# Altium PCB VE_Test_MEA_Solid_100mil.PcbDoc
Units mil, origin at the board's own origin, x right, y up, seen from the top; angles counter-clockwise.
Board outline 1950.82 x 1950 mil, 4 copper layers (Top Copper Layer, Internal Copper Layer 1, Internal Copper Layer 2, Bottom Copper Layer), stack 62.205 mil thick; 1 components, 1 nets, 60 pads, 104 vias.
Unrouted connection lines stored in the file: 17.
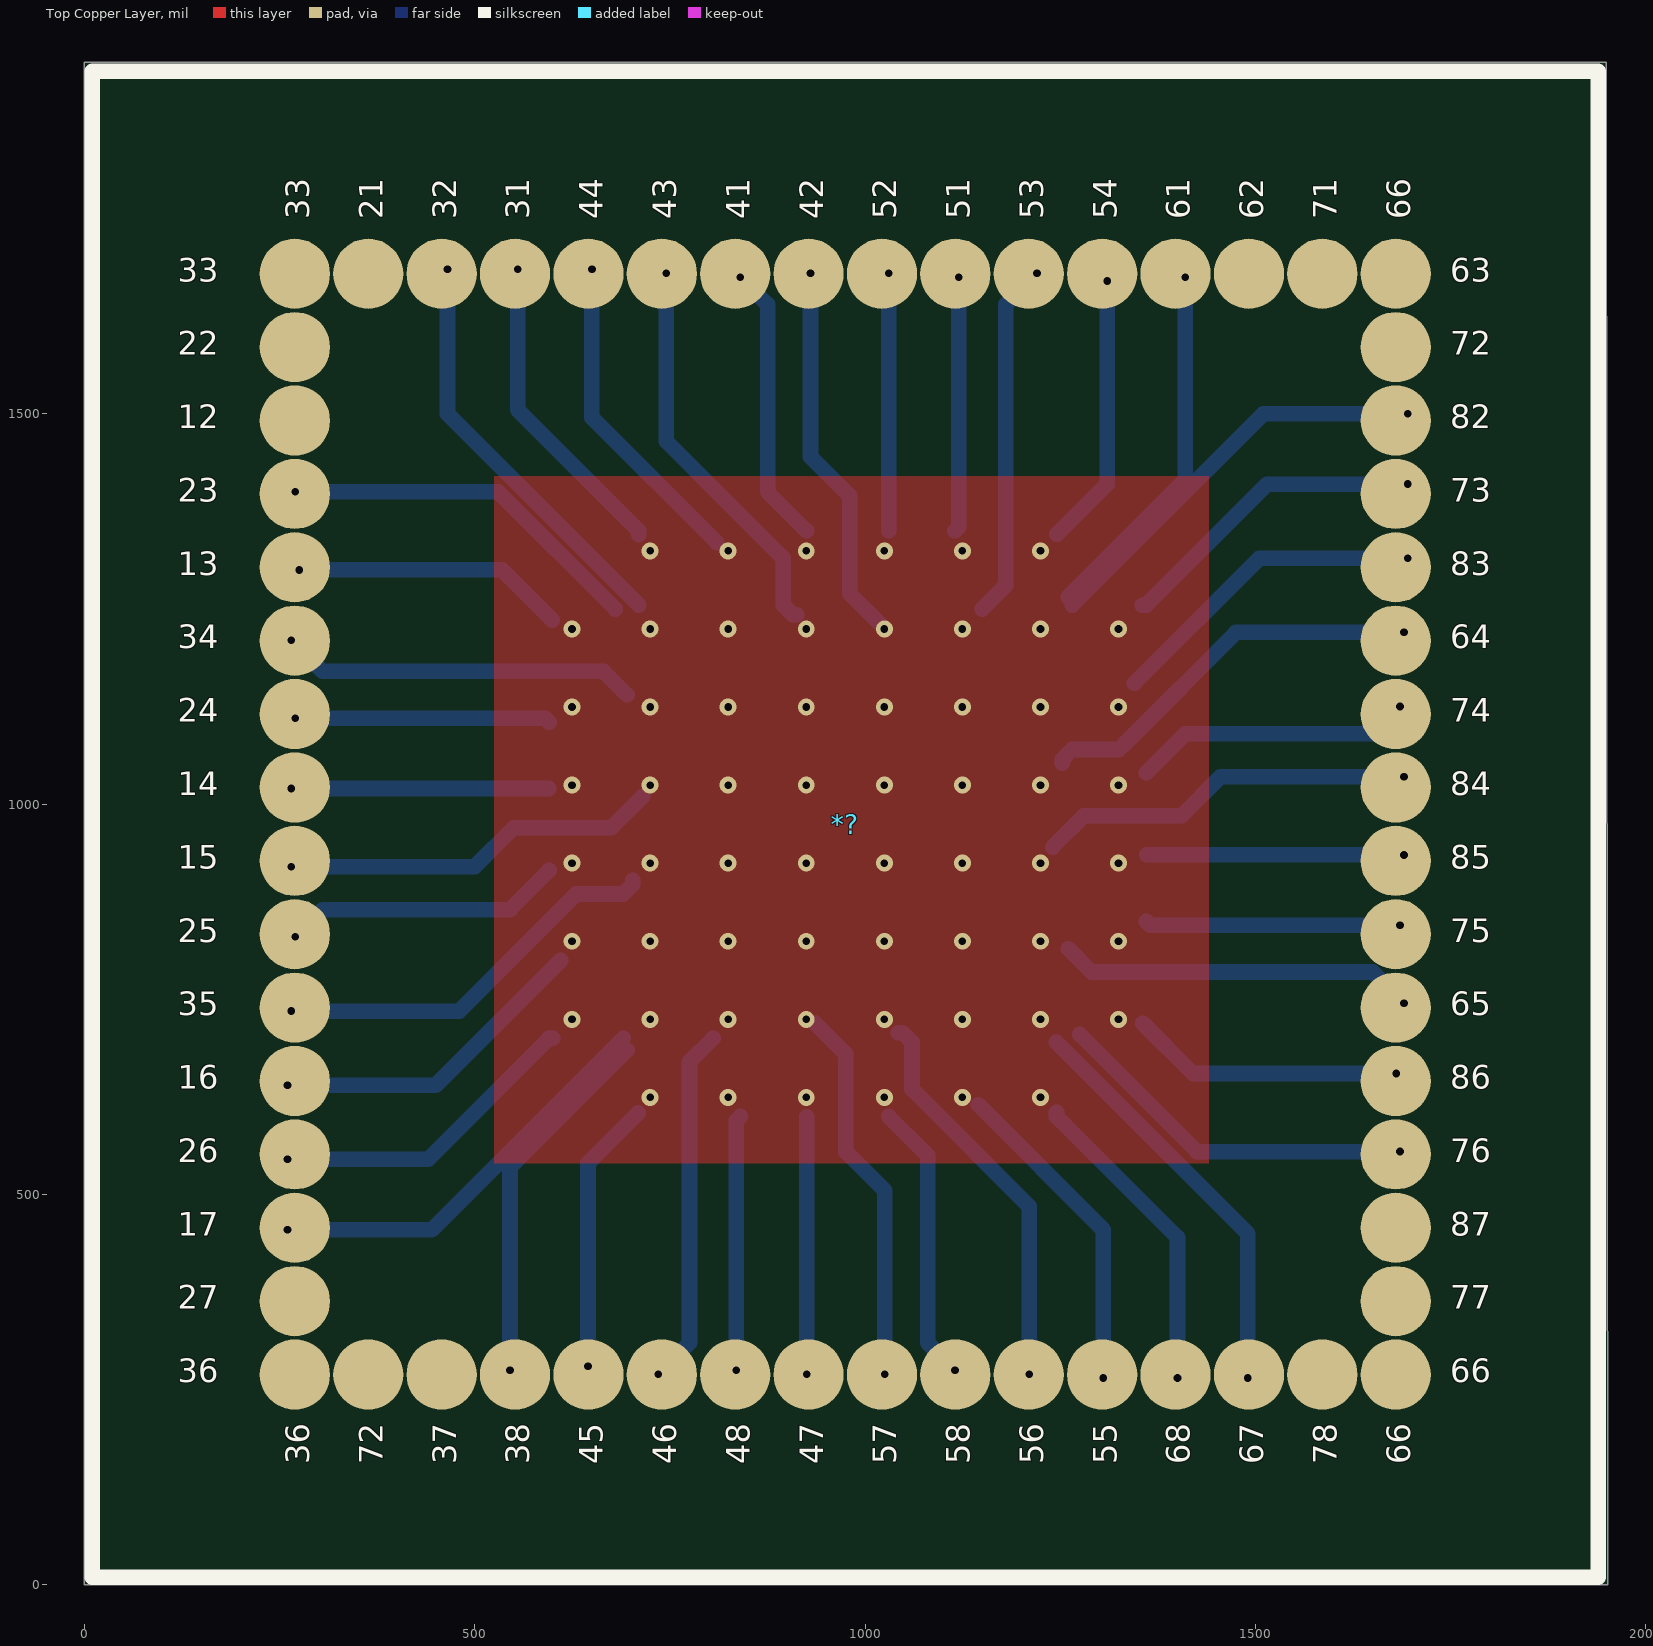
[diagram p0: Top Copper Layer view]
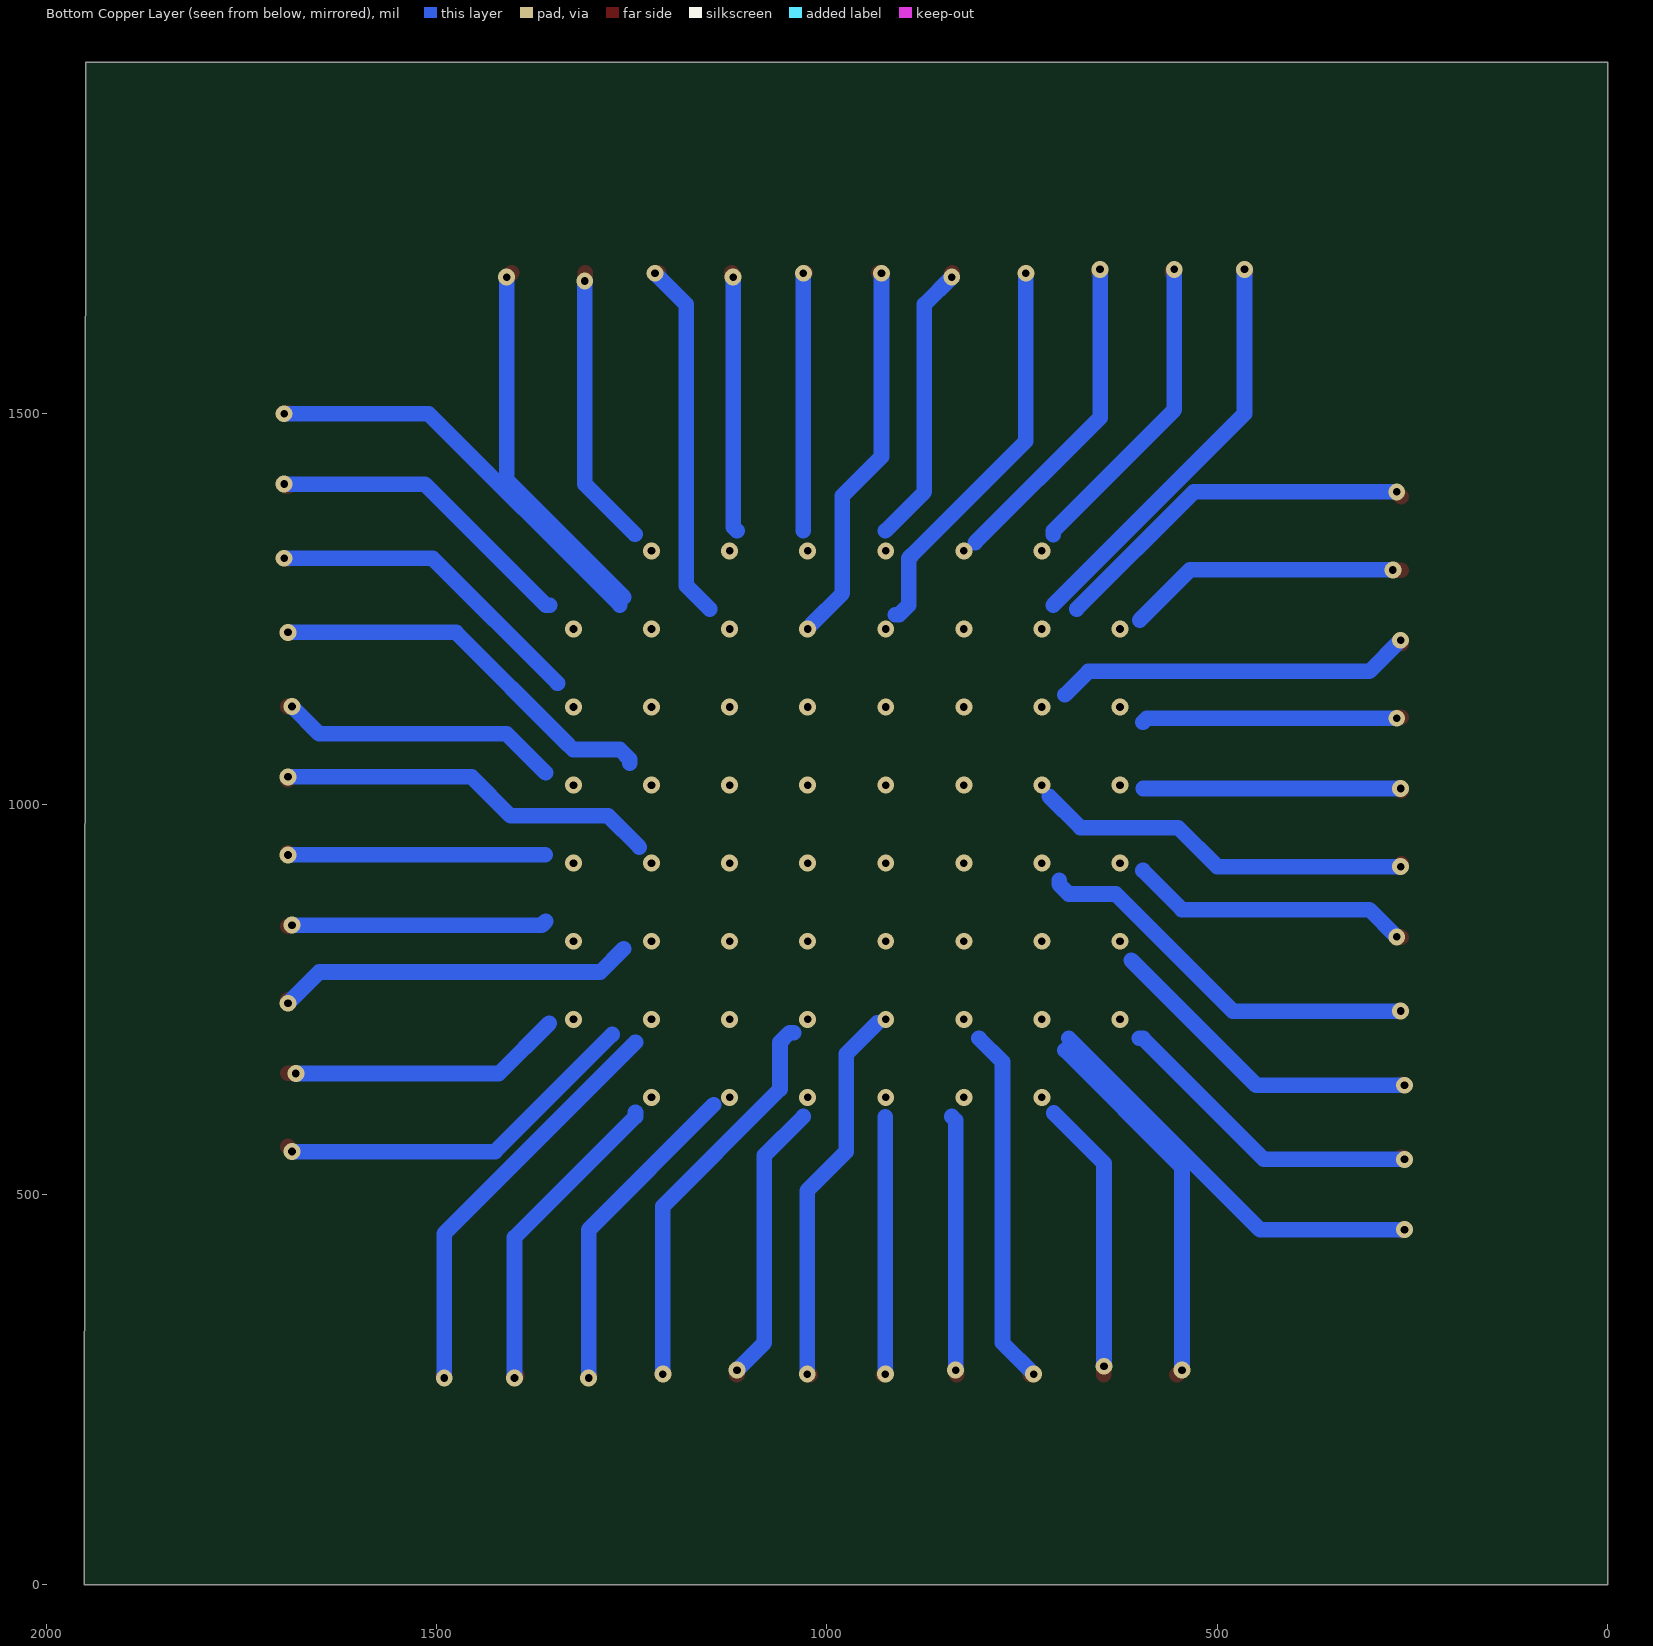
[diagram p1: Bottom Copper Layer view, seen from below]

## Layer stack, top to bottom
Top Solder: solder mask 0.3937, Solder Resist, Dk 3.5
Top Copper Layer: signal copper 1.378
Dielectric 1: prepreg 8.6614, FR-4, Dk 4.2
Internal Copper Layer 1: signal copper 1.378
Dielectric 2: core 39.3701, FR-4, Dk 4.2
Internal Copper Layer 2: signal copper 1.378
Dielectric 3: prepreg 8.6614, FR-4, Dk 4.2
Bottom Copper Layer: signal copper 1.378
Bottom Solder: solder mask 0.3937, Solder Resist, Dk 3.5

## Board outline
0,0 1950.82,0 1949.19,1950 0,1950

## Design rules (kind name [scope] priority, off if disabled: settings)
BoardOutlineClearance [All] p1: gap=15.75 ignorepadtopadclearanceinfootprint=FALSE
Clearance [All] p1: gap=4 ignorepadtopadclearanceinfootprint=TRUE
ComponentClearance [All] p1: gap=5.91 collisioncheckmode=3 verticalgap=5.91 showdistances=FALSE
HoleSize [All] p1: absolutevalues=TRUE maxlimit=15.75 minlimit=9.84 maxpercent=80.000 minpercent=20.000
HoleToHoleClearance [All] p1: gap=17.72 allowstackedmicrovias=TRUE
MinimumAnnularRing [All] p1: minimumring=5.91
MinimumSolderMaskSliver [All] p1: minsoldermaskwidth=5.91
PlaneClearance [All] p1: clearance=5.91
PlaneConnect [All] p1: planeconnectstyle=Relief reliefexpansion=9.84 reliefentries=4 reliefconductorwidth=5.91 reliefairgap=5.91
PolygonConnect [All] p1: connectstyle=Direct reliefconductorwidth=5.91 reliefentries=4 polygonreliefangle="90 Angle" airgapwidth=5.91
RoomDefinition VE_Test_MEA_Solid [InComponentClass('VE_Test_MEA_Solid')] p1 off: confinementstyle=ConfineIn formatcopy=TRUE lockcomponents=FALSE outline 0,0 2000,0 2000,1000 0,1000
RoutingVias [All] p1: holewidth=9.84 width=21.65 viastyle="Through Hole" minholewidth=9.84 minwidth=21.65 maxholewidth=15.75 maxwidth=31.5
SilkToSilkClearance [All] p1: silktosilkclearance=7.87
SilkToSolderMaskClearance [IsPad] p1: minsilkscreentomaskgap=7.87 clearancetoexposedcopper=TRUE
SolderMaskExpansion [All] p1: expansion=5.91 istentingtop=FALSE
Width [All] p1: maxlimit=1968.5 minlimit=5.91 preferedwidth=5.91
22 further rules are at their usual default settings.

## Components (designator, comment, footprint, x,y, rotation, side; value= is the part's Value field where it differs from the comment)
*? "POGO_PINS" MCS_MEA 974.5,974.41 r0 top locked

## Footprints (in the part's own frame and the unit in brackets; to place one, negate y for a bottom-side part, rotate by r counter-clockwise, add the part's x,y. Pads: shape width x height; smd on the part's side, far side on the other; paste and mask are expansions set on the pad)
MCS_MEA [mil]
  round 90 smd: 1(-705,-705) 1(-705,705) 2(-705,-611) 2(-611,-705) 2(-611,705) 2(705,-611) 3(-705,-517) 3(-517,-705) 3(-517,705) 3(705,-517) 4(-705,-423) 4(-423,-705) 4(-423,705) 4(705,-423) 5(-705,-329) 5(-329,-705) 5(-329,705) 5(705,-329) 6(-705,-235) 6(-235,-705) 6(-235,705) 6(705,-235) 7(-705,-141) 7(-141,-705) 7(-141,705) 7(705,-141) 8(-705,-47) 8(-47,-705) 8(-47,705) 8(705,-47) 9(-705,47) 9(47,-705) 9(47,705) 9(705,47) 10(-705,141) 10(141,-705) 10(141,705) 10(705,141) 11(-705,235) 11(235,-705) 11(235,705) 11(705,235) 12(-705,329) 12(329,-705) 12(329,705) 12(705,329) 13(-705,423) 13(423,-705) 13(423,705) 13(705,423) 14(-705,517) 14(517,-705) 14(517,705) 14(705,517) 15(-705,611) 15(611,-705) 15(611,705) 15(705,611) 16(705,-705) 16(705,705)
  silkscreen extent -965,-965 965,965

## Via types
v1: diameter 21.65, hole 9.84, Top Copper Layer to Bottom Copper Layer, 104 vias

## Nets (pads, with @x,y where several pads share a name; then routed paths per layer and width w, separated by ;. In a path a pad name is that pad's centre, name@x,y a point inside that pad or via, vN(x,y) a via of type N, cw(c..) or ccw(c..) an arc to the next point about the centre after c; other vN are vias at no path point)
Net*?_12: *?.12 *?.13 *?.14 *?.15 *?.16 | length 6076.2
  Top Copper Layer w20: v1@264.41,923.5 264.41,920.59 v1(265,920) ; *?.12@264.41,1299.5 274.5,1299.5 v1(275,1300) ; *?.13@264.41,1393.5 270,1399.09 v1(270,1400) ; v1(650,1685) 650,1682.09 v1@651.5,1680.59 ; v1(930,1680) 930.59,1680.59 v1@933.5,1680.59 ; *?.12@1303.5,269.41 1305,267.91 v1(1305,265) ; *?.12@1309.5,1680.59 1309.5,1670.5 v1(1310,1670) ; *?.13@1397.5,269.41 1397.5,267.5 v1(1400,265) ; *?.13@1403.5,1680.59 1409.09,1675 v1(1410,1675) ; v1(1490,265) 1490,267.91 *?.14@1491.5,269.41 ; *?.12@1690.59,1313.5 1692.09,1315 v1(1695,1315) ; *?.13@1690.59,1407.5 1692.5,1407.5 v1(1695,1410) ; *?.14@1690.59,1501.5 1692.09,1500 v1(1695,1500)
  Bottom Copper Layer w20: v1(265,920) 500,920 550,970 675,970 715,1010 ; v1(270,1400) 530,1400 680,1250 ; v1(275,1300) 535,1300 599.4,1235.6 ; v1(650,1685) 650,1495 810,1335 ; v1(930,1680) 930,1445 980,1395 980,1270 v1@1020,1230 ; 935,720 975,680 975,555 1025,505 ; 1145,615 1305,455 v1(1305,265) ; 1245,605 1245,600 1400,445 v1(1400,265) ; 1245,695 1490,450 v1(1490,265) ; 1245.6,1345.6 1310,1410 v1(1310,1670) ; 1260,1265 1410,1415 v1(1410,1675) ; 1265,1255 1510,1500 v1(1695,1500) ; 1345,1155 1505,1315 v1(1695,1315) ; 1355,1255 1360,1255 1515,1410 v1(1695,1410)
  other v1: 724.5,624.41 824.5,624.41 924.5,624.41 1024.5,624.41 1124.5,624.41 1224.5,624.41 624.5,724.41 724.5,724.41 824.5,724.41 924.5,724.41 1024.5,724.41 1124.5,724.41 1224.5,724.41 1324.5,724.41 624.5,824.41 724.5,824.41 824.5,824.41 924.5,824.41 1024.5,824.41 1124.5,824.41 1224.5,824.41 1324.5,824.41 624.5,924.41 724.5,924.41 824.5,924.41 924.5,924.41 1024.5,924.41 1124.5,924.41 1224.5,924.41 1324.5,924.41 624.5,1024.41 724.5,1024.41 824.5,1024.41 924.5,1024.41 1024.5,1024.41 1124.5,1024.41 1224.5,1024.41 1324.5,1024.41 624.5,1124.41 724.5,1124.41 824.5,1124.41 924.5,1124.41 1024.5,1124.41 1124.5,1124.41 1224.5,1124.41 1324.5,1124.41 624.5,1224.41 724.5,1224.41 824.5,1224.41 924.5,1224.41 1024.5,1224.41 1124.5,1224.41 1224.5,1224.41 1324.5,1224.41 724.5,1324.41 824.5,1324.41 924.5,1324.41 1024.5,1324.41 1124.5,1324.41 1224.5,1324.41
pads on no net: *?.1 *?.2 *?.3 *?.4 *?.5 *?.6 *?.7 *?.8 *?.9 *?.10 *?.11
copper on no net: | length 12752.3
  Top Copper Layer w20: v1(260,455) 262.91,455 v1@264.41,453.5 ; v1(260,545) 262.5,547.5 v1@264.41,547.5 ; v1(260,640) 262.91,640 v1@264.41,641.5 ; v1@264.41,735.5 264.5,735.5 v1(265,735) ; v1@264.41,829.5 264.91,830 v1(270,830) ; v1@264.41,1017.5 265,1018.09 v1(265,1020) ; v1@264.41,1111.5 268.5,1111.5 v1(270,1110) ; v1@264.41,1205.5 264.41,1209.41 v1(265,1210) ; v1@463.5,1680.59 465,1682.09 v1(465,1685) ; v1(545,275) 545.91,275 v1@551.5,269.41 ; v1(555,1685) 557.5,1682.5 v1@557.5,1680.59 ; v1(645,280) 645.5,279.5 v1@645.5,269.41 ; v1(735,270) 735.59,269.41 v1@739.5,269.41 ; v1(745,1680) 745.5,1680.5 v1@745.5,1680.59 ; v1@833.5,269.41 833.5,273.5 v1(835,275) ; v1@839.5,1680.59 840,1680.09 v1(840,1675) ; v1(925,270) 926.91,270 v1@927.5,269.41 ; v1@1021.5,269.41 1024.41,269.41 v1(1025,270) ; v1@1027.5,1680.59 1028.09,1680 v1(1030,1680) ; v1(1115,275) 1115,269.91 v1@1115.5,269.41 ; v1(1120,1675) 1121.5,1676.5 v1@1121.5,1680.59 ; v1@1209.5,269.41 1209.5,269.5 v1(1210,270) ; v1@1215.5,1680.59 1219.41,1680.59 v1(1220,1680) ; v1(1680,655) 1680.5,655.5 v1@1690.59,655.5 ; v1(1685,555) 1685,555.91 v1@1690.59,561.5 ; v1(1685,845) 1686.5,843.5 v1@1690.59,843.5 ; v1(1685,1125) 1690.09,1125 v1@1690.59,1125.5 ; v1(1690,745) 1690.59,745.59 v1@1690.59,749.5 ; v1(1690,935) 1690,936.91 v1@1690.59,937.5 ; v1(1690,1035) 1690.59,1034.41 v1@1690.59,1031.5 ; v1(1690,1220) 1690.5,1219.5 v1@1690.59,1219.5
  Bottom Copper Layer w20: v1(260,455) 445,455 690,700 ; v1(260,545) 440,545 595,700 600,700 ; v1(260,640) 450,640 610,800 ; v1(265,735) 480,735 620,875 630,885 690,885 702.4,897.4 702.4,902.4 ; v1(265,1020) 594.58,1020 ; v1(265,1210) 305,1170 630,1170 665,1170 695,1140 ; v1(270,830) 305,865 545,865 595,915 ; v1(270,1110) 590,1110 595,1105 ; v1(465,1685) 465,1500 710,1255 ; v1(545,275) 545,535 695,685 ; v1(555,1685) 555,1505 710,1350 710,1345 ; v1(645,280) 645,540 709.4,604.4 ; v1(735,270) 775,310 775,635 775,670 805,700 ; v1(745,1680) 745,1465 885,1325 895,1315 895,1255 907.4,1242.6 912.4,1242.6 ; v1(835,275) 835,595 840,600 ; v1(840,1675) 875,1640 875,1400 925,1350 ; v1(925,270) 925,599.58 ; v1(1025,270) 1025,505 ; 1030,600 1080,550 1080,310 v1(1115,275) ; 1030,1350.42 v1(1030,1680) ; 1042.6,707.4 1047.6,707.4 1060,695 1060,635 1070,625 1210,485 v1(1210,270) ; 1115,1350 1120,1355 v1(1120,1675) ; 1150,1250 1180,1280 1180,1315 1180,1640 v1(1220,1680) ; 1240,945 1280,985 1405,985 1455,1035 v1(1690,1035) ; 1252.6,1052.6 1252.6,1057.6 1265,1070 1325,1070 1335,1080 1475,1220 v1(1690,1220) ; 1260,815 1290,785 1325,785 1650,785 v1(1690,745) ; 1275,705 1425,555 v1(1685,555) ; 1355.6,719.4 1420,655 v1(1680,655) ; 1360,850 1365,845 v1(1685,845) ; 1360,1040 1410,1090 1650,1090 v1(1685,1125) ; 1360.42,935 v1(1690,935)

## Polygon pours and split planes (outlines as drawn)
Net*?_12 on Top Copper Layer "NET*?_12_L01_P000" (solid, pour order 0): 525,1420 1440,1420 1440,540 525,540

## Text inside footprints (layer, text, board x,y; h text height)
*?: Top Overlay "33" at 119.5,1669.41 h30; Top Overlay "22" at 119.5,1575.41 h30; Top Overlay "12" at 119.5,1481.41 h30; Top Overlay "23" at 119.5,1387.41 h30; Top Overlay "13" at 119.5,1293.41 h30; Top Overlay "34" at 119.5,1199.41 h30; Top Overlay "24" at 119.5,1105.41 h30; Top Overlay "14" at 119.5,1011.41 h30; Top Overlay "15" at 119.5,917.41 h30; Top Overlay "25" at 119.5,823.41 h30; Top Overlay "35" at 119.5,729.41 h30; Top Overlay "16" at 119.5,635.41 h30; Top Overlay "26" at 119.5,541.41 h30; Top Overlay "17" at 119.5,447.41 h30; Top Overlay "27" at 119.5,353.41 h30; Top Overlay "36" at 119.5,259.41 h30; Top Overlay "63" at 1749.5,1669.41 h30; Top Overlay "72" at 1749.5,1575.41 h30; Top Overlay "82" at 1749.5,1481.41 h30; Top Overlay "73" at 1749.5,1387.41 h30; Top Overlay "83" at 1749.5,1293.41 h30; Top Overlay "64" at 1749.5,1199.41 h30; Top Overlay "74" at 1749.5,1105.41 h30; Top Overlay "84" at 1749.5,1011.41 h30; Top Overlay "85" at 1749.5,917.41 h30; Top Overlay "75" at 1749.5,823.41 h30; Top Overlay "65" at 1749.5,729.41 h30; Top Overlay "86" at 1749.5,635.41 h30; Top Overlay "76" at 1749.5,541.41 h30; Top Overlay "87" at 1749.5,447.41 h30; Top Overlay "77" at 1749.5,353.41 h30; Top Overlay "66" at 1749.5,259.41 h30; Top Overlay "36" at 288,154.26 h30 r90; Top Overlay "72" at 382,154.26 h30 r90; Top Overlay "37" at 476,154.26 h30 r90; Top Overlay "38" at 570,154.26 h30 r90; Top Overlay "45" at 664,154.26 h30 r90; Top Overlay "46" at 758,154.26 h30 r90; Top Overlay "48" at 852,154.26 h30 r90; Top Overlay "47" at 946,154.26 h30 r90; Top Overlay "57" at 1040,154.26 h30 r90; Top Overlay "58" at 1134,154.26 h30 r90; Top Overlay "56" at 1228,154.26 h30 r90; Top Overlay "55" at 1322,154.26 h30 r90; Top Overlay "68" at 1416,154.26 h30 r90; Top Overlay "67" at 1510,154.26 h30 r90; Top Overlay "78" at 1604,154.26 h30 r90; Top Overlay "66" at 1698,154.26 h30 r90; Top Overlay "33" at 288,1749.26 h30 r90; Top Overlay "21" at 382,1749.26 h30 r90; Top Overlay "32" at 476,1749.26 h30 r90; Top Overlay "31" at 570,1749.26 h30 r90; Top Overlay "44" at 664,1749.26 h30 r90; Top Overlay "43" at 758,1749.26 h30 r90; Top Overlay "41" at 852,1749.26 h30 r90; Top Overlay "42" at 946,1749.26 h30 r90; Top Overlay "52" at 1040,1749.26 h30 r90; Top Overlay "51" at 1134,1749.26 h30 r90; Top Overlay "53" at 1228,1749.26 h30 r90; Top Overlay "54" at 1322,1749.26 h30 r90; Top Overlay "61" at 1416,1749.26 h30 r90; Top Overlay "62" at 1510,1749.26 h30 r90; Top Overlay "71" at 1604,1749.26 h30 r90; Top Overlay "66" at 1698,1749.26 h30 r90